# Altium PCB GAINS_PCB.PcbDoc
Units mil, origin at the board's own origin, x right, y up, seen from the top; angles counter-clockwise.
Board outline 6000 x 4000 mil, 2 copper layers (Top Layer, Bottom Layer); 18 components, 62 nets, 144 pads, 0 vias.
Unrouted connection lines stored in the file: 62.
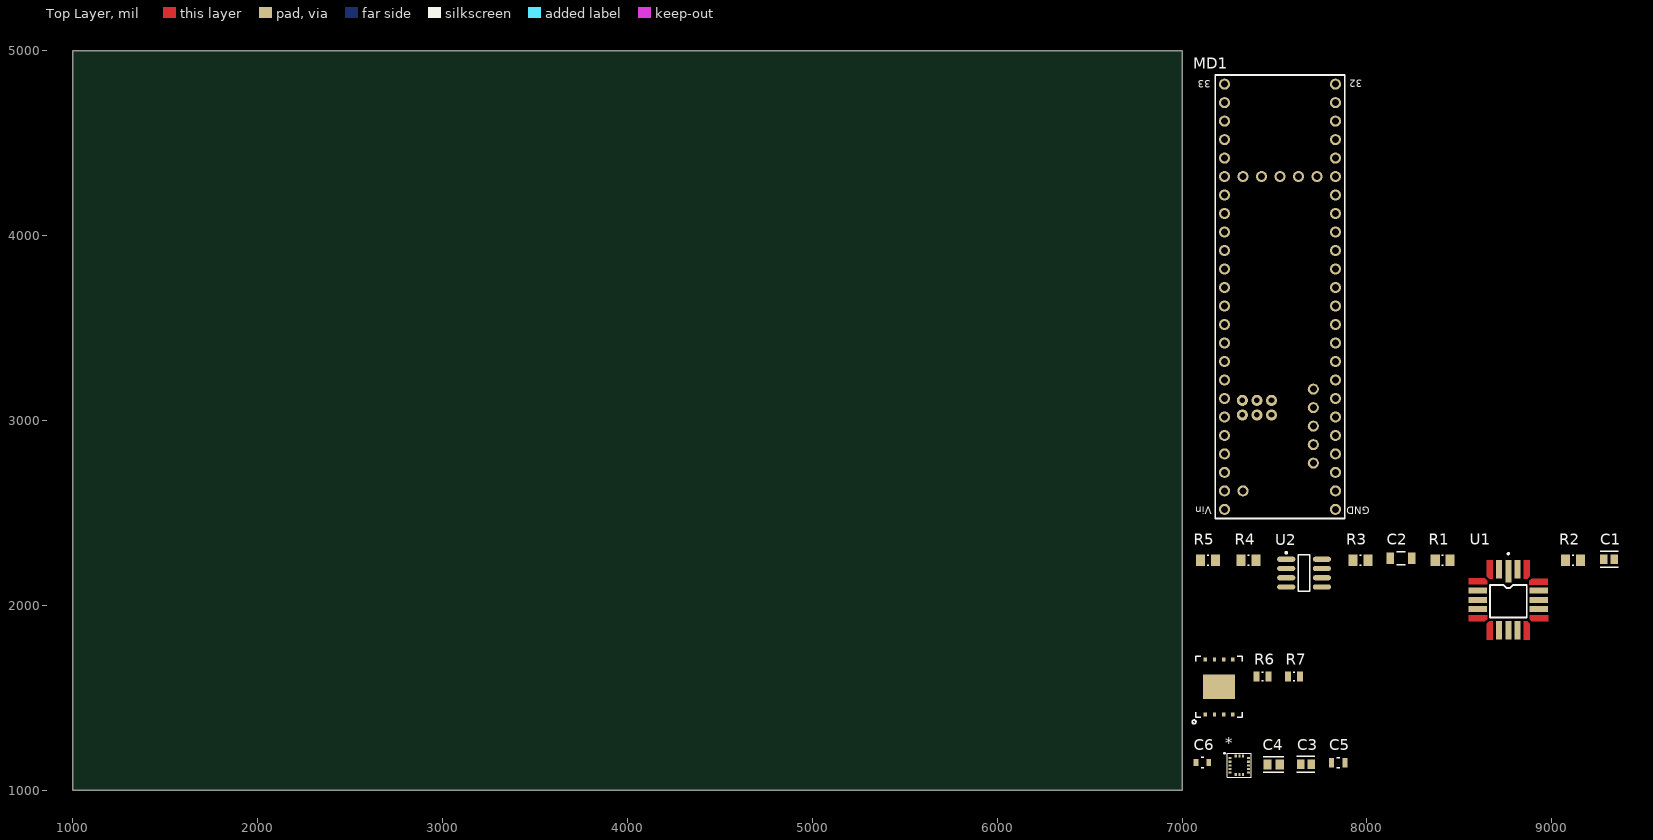
[diagram p0: Top Layer view]
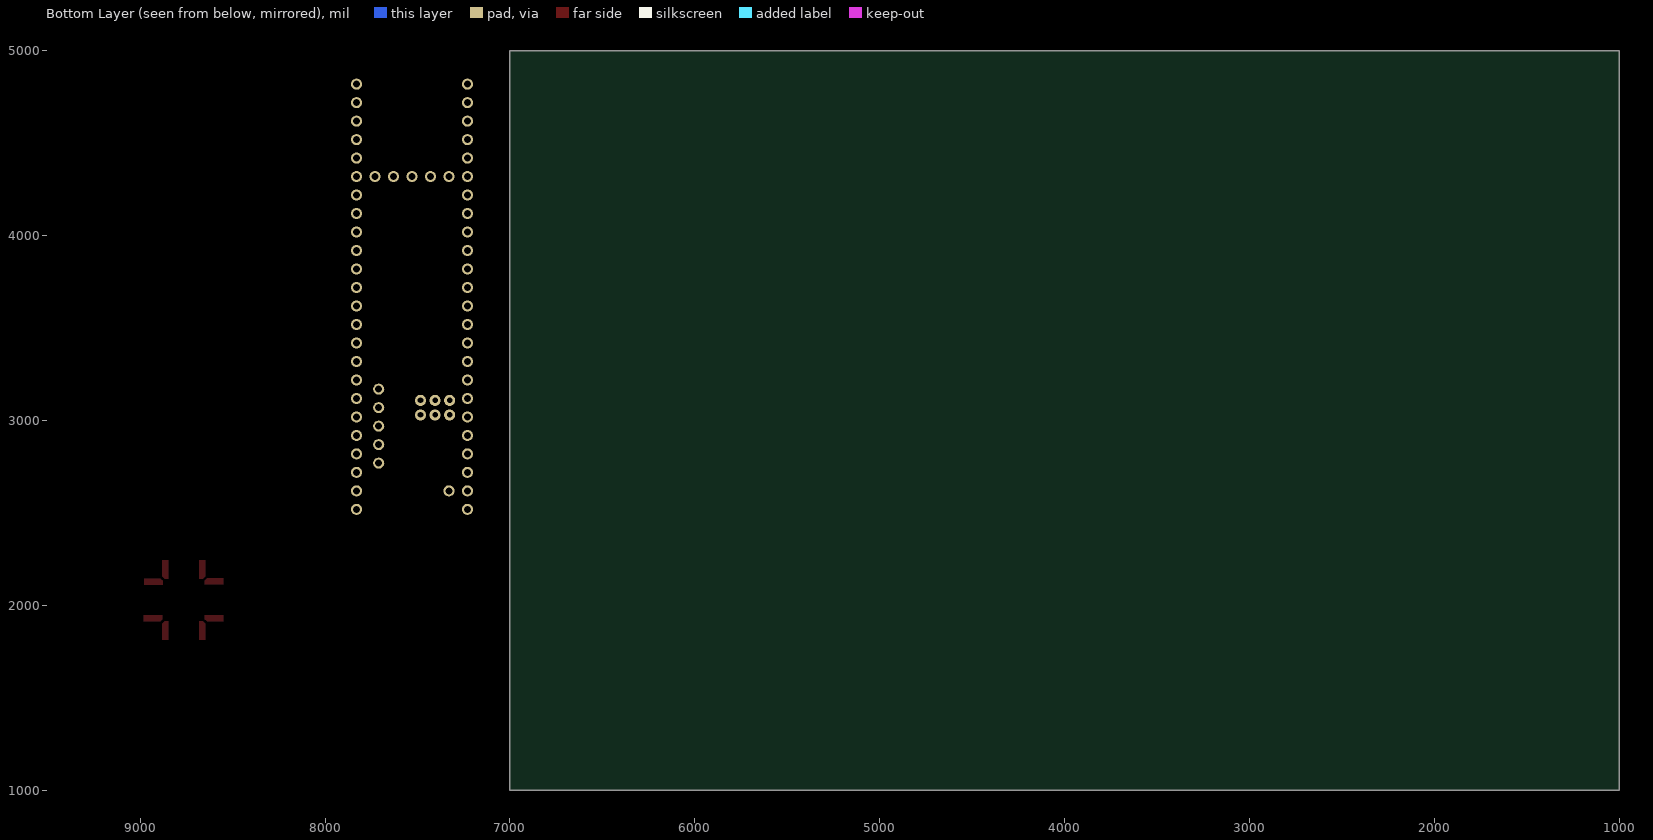
[diagram p1: Bottom Layer view, seen from below]

## Layer stack, top to bottom
Top Solder: solder mask 0.4, Solder Resist, Dk 3.5
Top Layer: signal copper 1.4
Dielectric 1: dielectric 12.6, FR-4, Dk 4.8
Bottom Layer: signal copper 1.4
Bottom Solder: solder mask 0.4, Solder Resist, Dk 3.5

## Board outline
1000,1000 7000,1000 7000,5000 1000,5000

## Design rules (kind name [scope] priority, off if disabled: settings)
Clearance [All] p1: gap=10 ignorepadtopadclearanceinfootprint=FALSE except(0: Arc-Hole Track-Hole SMDPad-Hole THPad-Hole Via-Hole Fill-Hole Poly-Hole Region-Hole Text-Hole)
DiffPairsRouting [All] p1: maxlimit=10 minlimit=10 mostfreqgap=10 toplayer_minwidth=15 toplayer_maxwidth=15 toplayer_prefwidth=15 bottomlayer_minwidth=15 bottomlayer_maxwidth=15 bottomlayer_prefwidth=15 maxuncoupledlength=500
PolygonConnect [All] p1: connectstyle=Relief reliefconductorwidth=10 reliefentries=4 polygonreliefangle="90 Angle" airgapwidth=10
RoutingVias [All] p1: holewidth=28 width=50 viastyle="Through Hole" minholewidth=28 minwidth=50 maxholewidth=28 maxwidth=50
SolderMaskExpansion [All] p1: expansion=4 istentingtop=FALSE
Width [All] p1: maxlimit=10 minlimit=10 preferedwidth=10
29 further rules are at their usual default settings.

## Classes and differential pairs
component class "TEENSY 4.1": MD1
component class "SDI-1521L - Accelerometer": C1 C2 R1 R2 R3 R4 R5 U1 U2
component class "IAM-20380 - Gyroscope": * C3 C4 C5 C6
differential pair AO: +AO_P -AO_N

## Components (designator, comment, footprint, x,y, rotation, side; value= is the part's Value field where it differs from the comment)
* "IAM-20380" "Gyro - IAM20380" 7310,1135 r0 top
C1 "0.01uF" FP-GCM21B-0_15-IPC_C 9310,2250 r0 top
C2 "0.1uF" FP-GCM31C-0_2-e0_3_0_8-MFG 8185,2255 r0 top
C3 "GCM21BR71E225KA73K" FP-GCM21B-0_15-IPC_C 7670,1140 r0 top
C4 "GRM21BR71H474KA88L" FP-GRM21B-0_1-IPC_B 7495,1140 r0 top
C5 "GCM21BR72A104KA37L" FP-GCM21B-0_15-MFG 7845,1150 r0 top
C6 "GCJ21BR72E103KXJ3L" FP-GCJ21B-0_2-MFG 7110,1150 r0 top
MD1 "TEENSY 4.1" Teensy4_1 7530,4320 r90 top
R1 "5k" RESC2013X50X30ML20T20 8410,2245 r0 top
R2 "5k" RESC2013X50X30ML20T20 9115,2245 r0 top
R3 "5k" RESC2013X50X30ML20T20 7965,2245 r0 top
R4 "5k" RESC2013X50X30ML20T20 7360,2245 r0 top
R5 "4.7k" RESC2013X60X30ML20T20 7140,2245 r0 top
R6 "10k" RESC2013X50X30LL20T20 7435,1615 r0 top
R7 "10k" RESC2013X50X30LL20T20 7605,1615 r0 top
U1 "SDI-1521L" "SDI 1521L" 8765,2030 r0 top
U2 "LT1413" LT-S8-8_M 7660,2175 r0 top
? "GD5F1GQ4UFYIGY" SON127P800X80_HS-9N 7200,1560 r90 top

## Footprints (in the part's own frame and the unit in brackets; to place one, negate y for a bottom-side part, rotate by r counter-clockwise, add the part's x,y. Pads: shape width x height; smd on the part's side, far side on the other; paste and mask are expansions set on the pad)
FP-GCJ21B-0_2-MFG [mm]
  rect 0.65x0.95 smd paste+0 mask+0: 1(-0.875,0) 2(0.875,0)
  silkscreen extent -0.18,-0.72 0.18,0.72, body extent -1.3,-0.82 1.3,0.82, height 0.25
FP-GCM21B-0_15-IPC_C [mil]
  rect 39.6x51.5 smd paste+0 mask+0: 1(-28.59,0) 2(28.59,0)
  silkscreen extent -48,-43 48,43, body extent -52,-31 52,31, height 10
FP-GCM21B-0_15-MFG [mm]
  rect 0.7x1.3 smd paste+0 mask+0: 1(-0.95,0) 2(0.95,0)
  silkscreen extent -0.23,-0.7 0.23,0.7, body extent -1.4,-0.8 1.4,0.8, height 0.25
FP-GCM31C-0_2-e0_3_0_8-MFG [mm]
  rect 1.05x1.6 smd paste+0 mask+0: 1(-1.475,0) 2(1.475,0)
  silkscreen extent -0.58,-0.9 0.58,0.9, body extent -2.1,-1 2.1,1, height 0.25
FP-GRM21B-0_1-IPC_B [mil]
  rect 45.58x53.63 smd paste+0 mask+0: 1(-32.57,0) 2(32.57,0)
  silkscreen extent -55,-43 55,43, body extent -65,-37 65,37, height 10
"Gyro - IAM20380" [mm]
  rect 0.4x0.3 smd mask+0.05: 1(-1.265,1) 2(-1.265,0.5) 3(-1.265,0) 4(-1.265,-0.5) 5(-1.265,-1) 9(1.265,-1) 10(1.265,-0.5) 11(1.265,0) 12(1.265,0.5) 13(1.265,1)
  rect 0.3x0.4 smd mask+0.05: 6(-0.5,-1.265) 7(0,-1.265) 8(0.5,-1.265) 14(0.5,1.265) 15(0,1.265) 16(-0.5,1.265)
  silkscreen extent -2.1,-1.65 1.65,1.72
LT-S8-8_M [mm] "SOIC, 8-Leads, Body 4.9x3.9mm, Pitch 1.27mm, IPC Low Density"
  oval 2.5x0.7 smd: 1(-2.45,1.905) 2(-2.45,0.635) 3(-2.45,-0.635) 4(-2.45,-1.905) 5(2.45,-1.905) 6(2.45,-0.635) 7(2.45,0.635) 8(2.45,1.905)
  silkscreen extent -2.57,-2.5 0.8,2.93, body extent -2,-2.5 2,2.5, height 1.76
RESC2013X50X30LL20T20 [mm] "Chip Resistor, 2-Leads, Body 2.00x1.25mm, IPC High Density"
  rect 0.85x1.35 smd: 1(-0.825,0) 2(0.825,0)
  silkscreen extent -0.1,-0.58 0.1,0.58, body extent -1.1,-0.72 1.1,0.72, height 0.5
RESC2013X50X30ML20T20 [mm] "Chip Resistor, 2-Leads, Body 2.00x1.25mm, IPC Low Density"
  rect 1.25x1.55 smd: 1(-1.025,0) 2(1.025,0)
  silkscreen extent -0.1,-0.67 0.1,0.67, body extent -1.1,-0.72 1.1,0.72, height 0.5
RESC2013X60X30ML20T20 [mm] "Chip Resistor, 2-Leads, Body 2.00x1.25mm, IPC Low Density"
  rect 1.25x1.55 smd: 1(-1.025,0) 2(1.025,0)
  silkscreen extent -0.1,-0.67 0.1,0.67, body extent -1.1,-0.72 1.1,0.72, height 0.6
"SDI 1521L" [mm]
  rect 0.84x3.05 smd mask+0.102: 1(0,3.935)
  rect 0.84x2.54 smd mask+0.102: 2(-1.27,4.19) 10(-1.27,-4.19) 11(0,-4.19) 12(1.27,-4.19) 20(1.27,4.19)
  round 0.025 smd mask+0.102: 3(-2.54,4.191) 4(-4.19,2.54) 8(-4.191,-2.54) 9(-2.54,-4.191) 13(2.54,-4.191) 14(4.191,-2.54) 18(4.154,2.515) 19(2.54,4.191)
  rect 2.54x0.84 smd mask+0.102: 5(-4.19,1.27) 6(-4.19,0) 7(-4.19,-1.27) 15(4.19,-1.27) 16(4.19,0) 17(4.19,1.27)
  Top Layer region: 2.12,-5.461 2.96,-5.461 2.96,-3.251 2.63,-2.921 2.12,-2.921
  Top Layer region: 5.461,-2.12 5.461,-2.96 3.251,-2.96 2.921,-2.63 2.921,-2.12
  Top Layer region: 5.424,2.095 5.424,2.935 3.214,2.935 2.884,2.604 2.884,2.095
  Top Layer region: 2.12,5.461 2.96,5.461 2.96,3.251 2.63,2.921 2.12,2.921
  Top Layer region: -5.46,2.12 -5.46,2.96 -3.25,2.96 -2.92,2.63 -2.92,2.12
  Top Layer region: -2.12,5.461 -2.96,5.461 -2.96,3.251 -2.63,2.921 -2.12,2.921
  Top Layer region: -5.461,-2.12 -5.461,-2.96 -3.251,-2.96 -2.921,-2.63 -2.921,-2.12
  Top Layer region: -2.12,-5.461 -2.96,-5.461 -2.96,-3.251 -2.63,-2.921 -2.12,-2.921
  silkscreen extent -2.54,-2.41 2.54,6.45
SON127P800X80_HS-9N [mm] "SON, 8-Leads, Body 6.00x8.00mm, Pitch 1.27mm, Thermal Pad 3.40x4.30mm, IPC Medium Density"
  rect 0.55x0.45 smd: 1(-3.775,1.905) 2(-3.775,0.635) 3(-3.775,-0.635) 4(-3.775,-1.905) 5(3.775,-1.905) 6(3.775,-0.635) 7(3.775,0.635) 8(3.775,1.905)
  rect 3.4x4.4 smd paste-2.15: 9(0,0)
  silkscreen extent -5.08,-3.2 4.2,3.68, body extent -4.05,-3.05 4.05,3.05, height 0.8
Teensy4_1 [mil] "Mircocontroller"
  round 60 hole 37.99: 0(-1700,-300) 1(-1600,-300) 2(-1500,-300) 3(-1400,-300) 4(-1300,-300) 5(-1200,-300) 6(-1100,-300) 7(-1000,-300) 8(-900,-300) 9(-800,-300) 10(-700,-300) 11(-600,-300) 12(-500,-300) 13(-500,300) 14(-600,300) 15(-700,300) 16(-800,300) 17(-900,300) 18(-1000,300) 19(-1100,300) 20(-1200,300) 21(-1300,300) 22(-1400,300) 23(-1500,300) 24(-300,-300) 25(-200,-300) 26(-100,-300) 27(0,-300) 28(100,-300) 29(200,-300) 30(300,-300) 31(400,-300) 32(500,-300) 33(500,300) 34(400,300) 35(300,300) 36(200,300) 37(100,300) 38(0,300) 39(-100,300) 40(-200,300) 41(-300,300) 42(-1800,300) 43(-1700,300) 44(-1600,300) 45(-400,300) 46(-1800,-300) 47(-400,-300) 48(-1700,200) 55(-1550,-180) 56(-1450,-180) 57(-1350,-180) 58(-1250,-180) 59(-1150,-180) 60(0,200) 61(0,100) 62(0,0) 63(0,-100) 64(0,-200)
  round 60 hole 30: 49(-1289.37,203.54) 50(-1210.63,203.54) 51(-1289.37,124.8) 52(-1210.63,124.8) 53(-1289.37,46.06) 54(-1210.63,46.06)
  silkscreen extent -1850,-350 550,350

## Part data
*: "IAM-20380 High Performance Gyroscope"
C1: library part CMP-06035-043554-1, "Ceramic Capacitor for Automotive 10nF ±1% 50VDC X8G 0805 Embossed T/R (GCM21B5G1H103FA16K)"
C2: library part CMP-06035-040557-1, "Ceramic Capacitor for Automotive 100nF ±1% 50VDC C0G 1206 Embossed T/R (GCM31C5C1H104FA16L)"
C3: library part CMP-06035-054411-1, "Ceramic Capacitor for Automotive 2.2uF ±10% 25VDC X7R 0805 Embossed T/R", Capacitance=2.2uF, Case Code (Imperial)=0805, Case Code (Metric)=2012, Dielectric=X7R, Max Operating Temperature=125°C, Min Operating Temperature=-55°C, Package Quantity=10000, Tolerance=10%, Voltage Rating=25V, Case/Package=0805, Depth=1.25mm, Height=1.25mm, Lead Free="Lead Free", Length=2mm, Mount="Surface Mount", Packaging="Tape and Reel", Radiation Hardening=No, Termination=SMD/SMT, Voltage Rating (DC)=25V, Width=1.25mm
C4: library part CMP-06035-060025-1, "Chip Multilayer Ceramic Capacitors for General Purpose, 0805, 0.47uF, X7R, 15%, 10%, 50V", Capacitance=470nF, Case Code (Imperial)=0805, Case Code (Metric)=2012, Dielectric=X7R, Max Operating Temperature=125°C, Min Operating Temperature=-55°C, Package Quantity=1, Tolerance=10%, Voltage=50V, Case/Package=0805, Construction=Flat, Depth=1.25mm, Height=1.25mm, Lead Free="Lead Free", Length=2mm, Material=Ceramic, Mount="Surface Mount", Packaging="Tape and Reel", REACH SVHC="No SVHC", Series=GRM, Size=1.25mm, Termination=SMD/SMT, Thickness=0.053inch, Voltage Rating=50V, Voltage Rating (DC)=50V, Width=0.049inch
C5: library part CMP-2007-03364-2, "Ceramic Capacitor for Automotive 100nF ±10% 100VDC X7R 0805 Embossed T/R", Capacitance=100nF, Case Code (Imperial)=0805, Case Code (Metric)=2012, Dielectric=X7R, Max Operating Temperature=125°C, Min Operating Temperature=-55°C, Package Quantity=1, Ratings=AEC-Q200, Tolerance=10%, Voltage=100V, Case/Package=0805, Depth=1.25mm, Height=1.25mm, Lead Free="Lead Free", Length=2mm, Mount="Surface Mount", Packaging="Tape and Reel", Radiation Hardening=No, REACH SVHC="No SVHC", Termination=SMD/SMT, Thickness=0.055inch, Voltage Rating=100V, Voltage Rating (DC)=100V, Width=0.049inch
C6: library part CMP-2007-03220-2, "CAP CER 10000PF 250V X7R 0805", Capacitance=10nF, Case Code (Imperial)=0805, Case Code (Metric)=2012, Dielectric=X7R, Max Operating Temperature=125°C, Min Operating Temperature=-55°C, Package Quantity=3000, Ratings=AEC-Q200, Tolerance=10%, Voltage Rating=250V, Case/Package=0805, Features="Soft Termination", Length=0.079inch, Mount="Surface Mount", Packaging="Tape and Reel", REACH SVHC="No SVHC", Termination=SMD/SMT, Thickness=0.057inch, Voltage Rating (DC)=250V, Width=0.049inch
MD1: library part 080115a1ce54750370cf87ec145ee29, "TEENSY 4.1 (HEADERS)"
R1 R2 R3 R4: library part CMP-2001-04239-1, "CRCW08055K00FKTA", Manufacturer="Vishay Dale", Part Number=CRCW08055K00FKTA
R5: library part CMP-2001-02407-1, "RK73H2ATTD4701F", Manufacturer="KOA Speer", Part Number=RK73H2ATTD4701F
R6 R7: library part CMP-2001-04257-1, "CRCW080510K0JNTA", Manufacturer="Vishay Dale", Part Number=CRCW080510K0JNTA
U1: library part SDI1521L, "SDI1521L Accelerometer +/- 2G"
U2: library part CMP-0359-02913-2, "Dual Channel, Precision Single Supply Operational Amplifier, 0.95 MHz Typical GBW, 0.3 V/us Typical SR, 3 to 22 V, 8-Pin SOIC (S8-8), Commercial, Pb-Free, Reel", Manufacturer="Linear Technology", PartNumber=LT1413S8#TRPBF, Channels (#)=2, ComponentLink1Description="Manufacturer URL", ComponentLink1URL=http://www.linear.com/, ComponentLink2Description=Datasheet, ComponentLink2URL=http://cds.linear.com/docs/en/datasheet/lt1413.pdf, ComponentLink3Description="Package Specification", ComponentLink3URL=http://cds.linear.com/docs/en/packaging/05081610_G_SO8.pdf, DatasheetVersion="Rev. 0", GBW (MHz) Typical=0.95, Is (mA) Typical=0.33, Linear Technology Part Number=LT1413, Mounting Technology="Surface Mount", PackageDescription="8-Pin Plastic Small Outline, Body 4.9 x 3.9 mm, Pitch 1.27 mm", PackageReference=LT-S8-8, PackageVersion="Rev G", Packing=Reel, RevisionNote="URLs updated", RoHS=Pb-Free, SR (V/us) Typical=0.3, Type=VFB, Vos (mV) Typical=0.05, Vs Max (V)=22, Vs Min (V)=3
?: "FLASH - NAND Memory IC 1Gbit SPI - Quad I/O 120 MHz 8-WSON (6x8) - GD5F1GQ4UFYIGY", Supplier Part Number 1=1970-1081-1-ND, Supplier 1=Digi-Key

## Nets (pads, with @x,y where several pads share a name; then routed paths per layer and width w, separated by ;. In a path a pad name is that pad's centre, name@x,y a point inside that pad or via, vN(x,y) a via of type N, cw(c..) or ccw(c..) an arc to the next point about the centre after c; other vN are vias at no path point)
3V3: *.1 *.4 *.5 *.16 ?.8 C3.1 C5.1 C6.1 MD1.47 R4.2 R6.2 R7.2
5V: C2.1 R2.1 U1.3 U1.9 U1.11 U1.14 U2.6
AO_N: MD1.24 U1.16
AO_P: MD1.25 U1.12
FLASH_CS: ?.1 MD1.10
FLASH_MISO: ?.2 MD1.12
FLASH_MOSI: ?.5 MD1.11
GND: *.8 *.9 *.10 *.11 *.12 *.13 *.15 ?.4 C2.2 C3.2 C4.2 C5.2 C6.2 MD1.43 MD1.45 MD1.46 R1.1 R5.1 U1.2 U1.5 U1.6 U1.18 U1.19 U2.2
GYRO_INT: *.6 MD1.38
I_T: R5.2 U1.8 U2.1
Net*_7: *.7
Net*_14: *.14 C4.1
Net_3: ?.3
Net_7: ?.7
NetC1_1: C1.1 C1.2 R1.2 R2.2 U1.17
NetMD1_0: MD1.0
NetMD1_1: MD1.1
NetMD1_2: MD1.2
NetMD1_3: MD1.3
NetMD1_4: MD1.4
NetMD1_5: MD1.5
NetMD1_6: MD1.6
NetMD1_7: MD1.7
NetMD1_8: MD1.8
NetMD1_9: MD1.9
NetMD1_14: MD1.14
NetMD1_15: MD1.15
NetMD1_16: MD1.16
NetMD1_17: MD1.17
NetMD1_21: MD1.21
NetMD1_22: MD1.22
NetMD1_23: MD1.23
NetMD1_26: MD1.26
NetMD1_27: MD1.27
NetMD1_28: MD1.28
NetMD1_29: MD1.29
NetMD1_30: MD1.30
NetMD1_31: MD1.31
NetMD1_32: MD1.32
NetMD1_33: MD1.33
NetMD1_34: MD1.34
NetMD1_35: MD1.35
NetMD1_36: MD1.36
NetMD1_37: MD1.37
NetMD1_39: MD1.39
NetMD1_40: MD1.40
NetMD1_41: MD1.41
NetMD1_42: MD1.42
NetMD1_44: MD1.44
NetMD1_48: MD1.48
NetR3_2: R3.2 R4.1 U2.8
NetU1_1: U1.1
NetU1_4: U1.4
NetU1_7: U1.7
NetU1_10: U1.10
NetU1_13: U1.13
NetU1_15: U1.15
NetU1_20: U1.20
SCL: *.2 MD1.19 R6.1
SCLK: ?.6 MD1.13
SDA: *.3 MD1.18 R7.1
V_T: MD1.20 R3.1 U2.7
pads on no net: ?.9 MD1.49 MD1.50 MD1.51 MD1.52 MD1.53 MD1.54 MD1.55 MD1.56 MD1.57 MD1.58 MD1.59 MD1.60 MD1.61 MD1.62 MD1.63 MD1.64 U2.3 U2.4 U2.5

## Text inside footprints (layer, text, board x,y; h text height)
MD1: Top Overlay "GND" at 8015,2535 h39.37 r180; Top Overlay "32" at 7975,4845 h39.37 r180; Top Overlay "33" at 7155,4840 h39.37 r180; Top Overlay "Vin" at 7160,2535 h39.37 r180